# EAGLE board Ping Pong Game (EAGLE 7.6.0)

Size 73.58 x 63.39 mm. Coordinates in mm from the lower left corner, seen from the top.
Outline: 0,0 56.82,0 56.82,53.33 0,53.33 0,0
Copper layers (1*16): Top 0.035mm / dielectric 1.5mm / Bottom 0.035mm
Design rules "default": minimum track width 10mil, minimum drill 24mil, track to track 8mil, track to pad 8mil, pad to pad 8mil, via to via 8mil, smd to smd 8mil, copper to edge 40mil, drill to drill 8mil, minimum pad ring 10mil, minimum via ring 8mil, stop-mask expansion 4mil, vias tented up to drill 0mil, thermal gap 10mil

## Footprints (pad centres in the part's own frame; a part is rotated, then mirrored left to right if it is on the bottom)
0207/10 = drill 0.813 octagon: 1 -5.08,0; 2 5.08,0
TL1105 = drill 1 pad 1.676: 1 -2.25,3.25; 2 2.25,3.25; 3 -2.25,-3.25; 4 2.25,-3.25
ARDUINO_UNO = drill 1.016 pad 1.88: 0 63.5,50.8; 1 60.96,50.8; 2 58.42,50.8; 3 55.88,50.8; 3.3V 35.56,2.54; 4 53.34,50.8; 5 50.8,50.8; 5V 38.1,2.54; 6 48.26,50.8; 7 45.72,50.8; 8 41.656,50.8; 9 39.116,50.8; 10 36.576,50.8; 11 34.036,50.8; 12 31.496,50.8; 13 28.956,50.8; A0 50.8,2.54; A1 53.34,2.54; A2 55.88,2.54; A3 58.42,2.54; A4 60.96,2.54; A5 63.5,2.54; AREF 23.876,50.8; GND 26.416,50.8; GND. 43.18,2.54; GND.. 40.64,2.54; I/OREF 30.48,2.54; N/C 27.94,2.54; RESET 33.02,2.54; SCL 18.796,50.8; SDA 21.336,50.8; VIN 45.72,2.54 | hole 3.2: 66.04,7.62; 66.04,35.56; 15.24,50.8; 13.97,2.54
1X16P-2.54-2.54-11.6-3.0-BLACK-MALE = drill 0.889 pad 1.651 square: 1 0,19.05 | drill 0.889 pad 1.651: 2 0,16.51; 3 0,13.97; 4 0,11.43; 5 0,8.89; 6 0,6.35; 7 0,3.81; 8 0,1.27; 9 0,-1.27; 10 0,-3.81; 11 0,-6.35; 12 0,-8.89; 13 0,-11.43; 14 0,-13.97; 15 0,-16.51; 16 0,-19.05

## Placement (x,y rotation side)
RContrast Resistor  1‎Ω  [0207/10]  5,149.78 0 top  (outside the outline)
RCurrent_Limiting_Resistor  220‎Ω  [0207/10]  5,35.48 0 top
RPull_Up Resistor  1k‎Ω  [0207/10]  5,98.98 0 top  (outside the outline)
RPull_Up Resistor1  1k‎Ω  [0207/10]  5,111.68 0 top  (outside the outline)
RPull_Up Resistor2  1k‎Ω  [0207/10]  5,124.38 0 top  (outside the outline)
RPull_Up Resistor3  1k‎Ω  [0207/10]  5,137.08 0 top  (outside the outline)
SP1_Down_Button  [TL1105]  5,60.88 0 top
SP1_Up_Button  [TL1105]  5,48.18 0 top
SP2_Down_Button  [TL1105]  5,86.28 0 top  (outside the outline)
SP2_UP_Button  [TL1105]  5,73.58 0 top  (outside the outline)
UArduino UNO R3 board  [ARDUINO_UNO]  5,10.08 0 top
UGame LCD  [1X16P-2.54-2.54-11.6-3.0-BLACK-MALE]  5,22.78 0 top

## Library data of the parts
RContrast Resistor RCurrent_Limiting_Resistor RPull_Up Resistor RPull_Up Resistor1-RPull_Up Resistor3 SP1_Down_Button SP1_Up_Button SP2_Down_Button SP2_UP_Button UArduino UNO R3 board UGame LCD = AUTODESK_CIRCUITS_BREADBOARD

## Nets
N$1: RCurrent_Limiting_Resistor.1 UGame LCD.15
N$2: UArduino UNO R3 board.2 UGame LCD.14
N$3: UArduino UNO R3 board.3 UGame LCD.13
N$4: UArduino UNO R3 board.4 UGame LCD.12
N$5: UArduino UNO R3 board.5 UGame LCD.11
N$6: UArduino UNO R3 board.11 UGame LCD.6
N$7: UArduino UNO R3 board.12 UGame LCD.4
N$8: RPull_Up Resistor2.1 SP2_UP_Button.4 UArduino UNO R3 board.8
N$9: RCurrent_Limiting_Resistor.2 SP1_Down_Button.2 SP1_Up_Button.1 SP2_Down_Button.2 SP2_UP_Button.1 UArduino UNO R3 board.5V UGame LCD.2
N$10: RPull_Up Resistor3.2 SP2_Down_Button.3 UArduino UNO R3 board.10
N$11: RContrast Resistor.2 RPull_Up Resistor1.1 RPull_Up Resistor2.2 RPull_Up Resistor3.1 RPull_Up Resistor.2 UArduino UNO R3 board.GND.. UGame LCD.1 UGame LCD.5 UGame LCD.16
N$12: RPull_Up Resistor1.2 SP1_Down_Button.3 UArduino UNO R3 board.7
N$13: RPull_Up Resistor.1 SP1_Up_Button.4 UArduino UNO R3 board.6
N$14: RContrast Resistor.1 UGame LCD.3
N$15: SP1_Up_Button.2
N$16: SP1_Up_Button.3
N$17: SP1_Down_Button.4
N$18: SP1_Down_Button.1
N$19: SP2_UP_Button.2
N$20: SP2_UP_Button.3
N$21: SP2_Down_Button.4
N$22: SP2_Down_Button.1

## Tracks (layer width: path | path; a pad name or v marks a point on that pad's centre or on a via)
N$1  (1 unrouted)
N$2  (1 unrouted)
N$3  (1 unrouted)
N$4  (1 unrouted)
N$5  (1 unrouted)
N$6  (1 unrouted)
N$7  (1 unrouted)
N$8  (2 unrouted)
N$9  (6 unrouted)
N$10  (2 unrouted)
N$11  (8 unrouted)
N$12  (2 unrouted)
N$13  (2 unrouted)
N$14  (1 unrouted)